# EAGLE board AHNS_AP_MK3 (EAGLE 5.10)
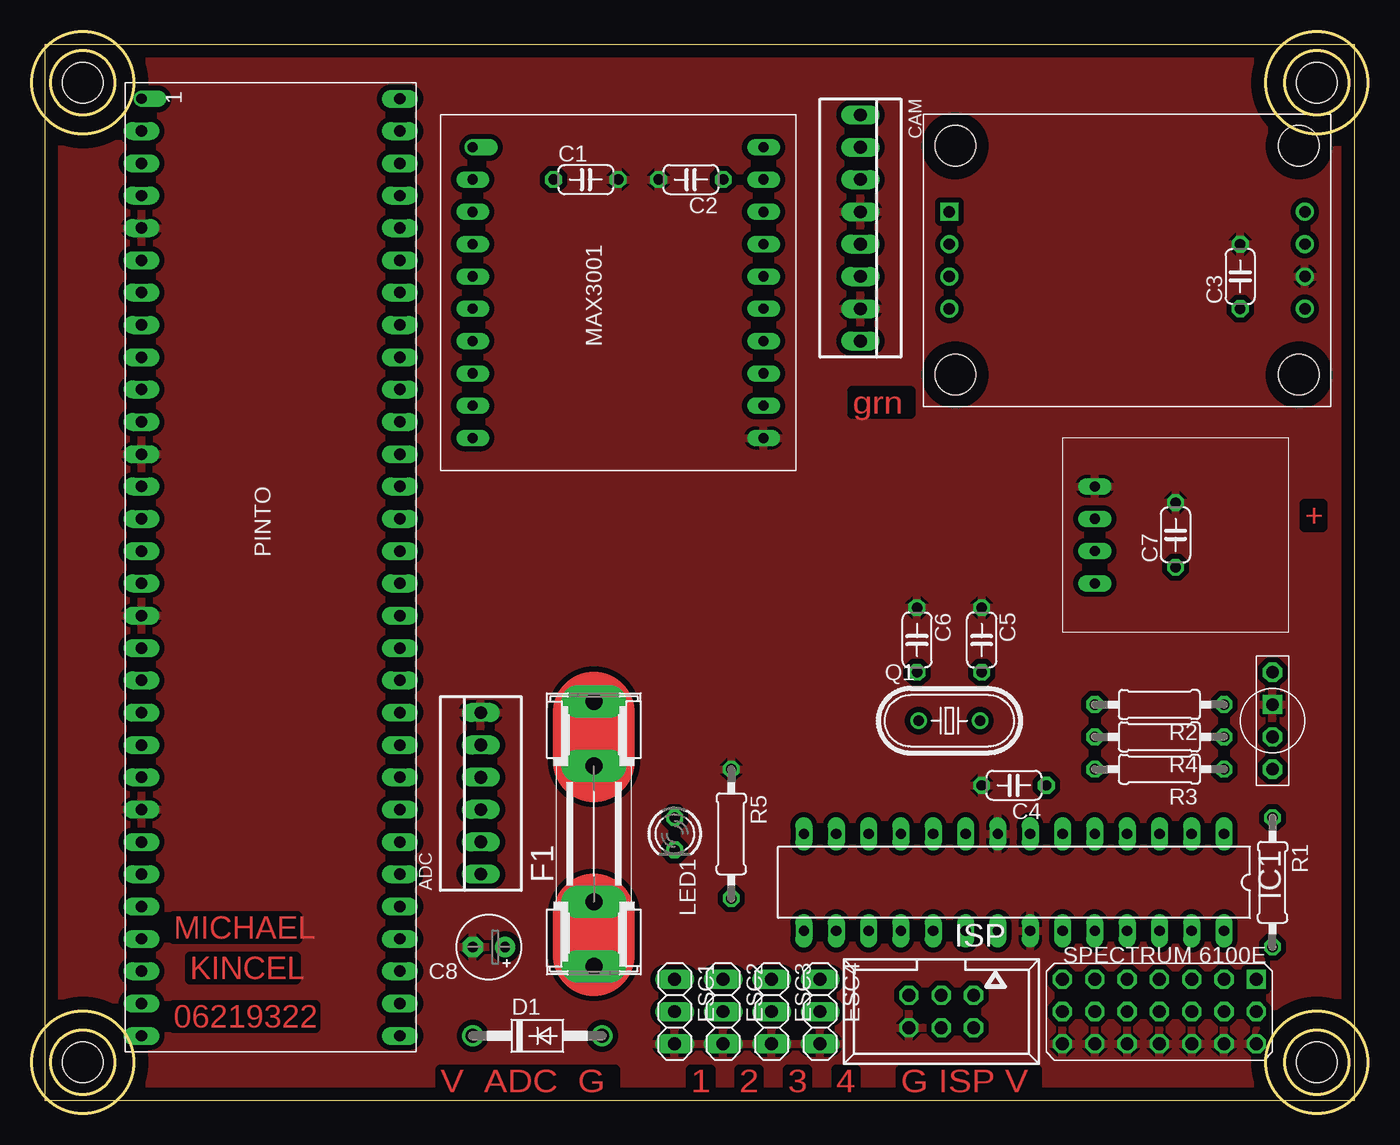
[diagram p0: board, top side]
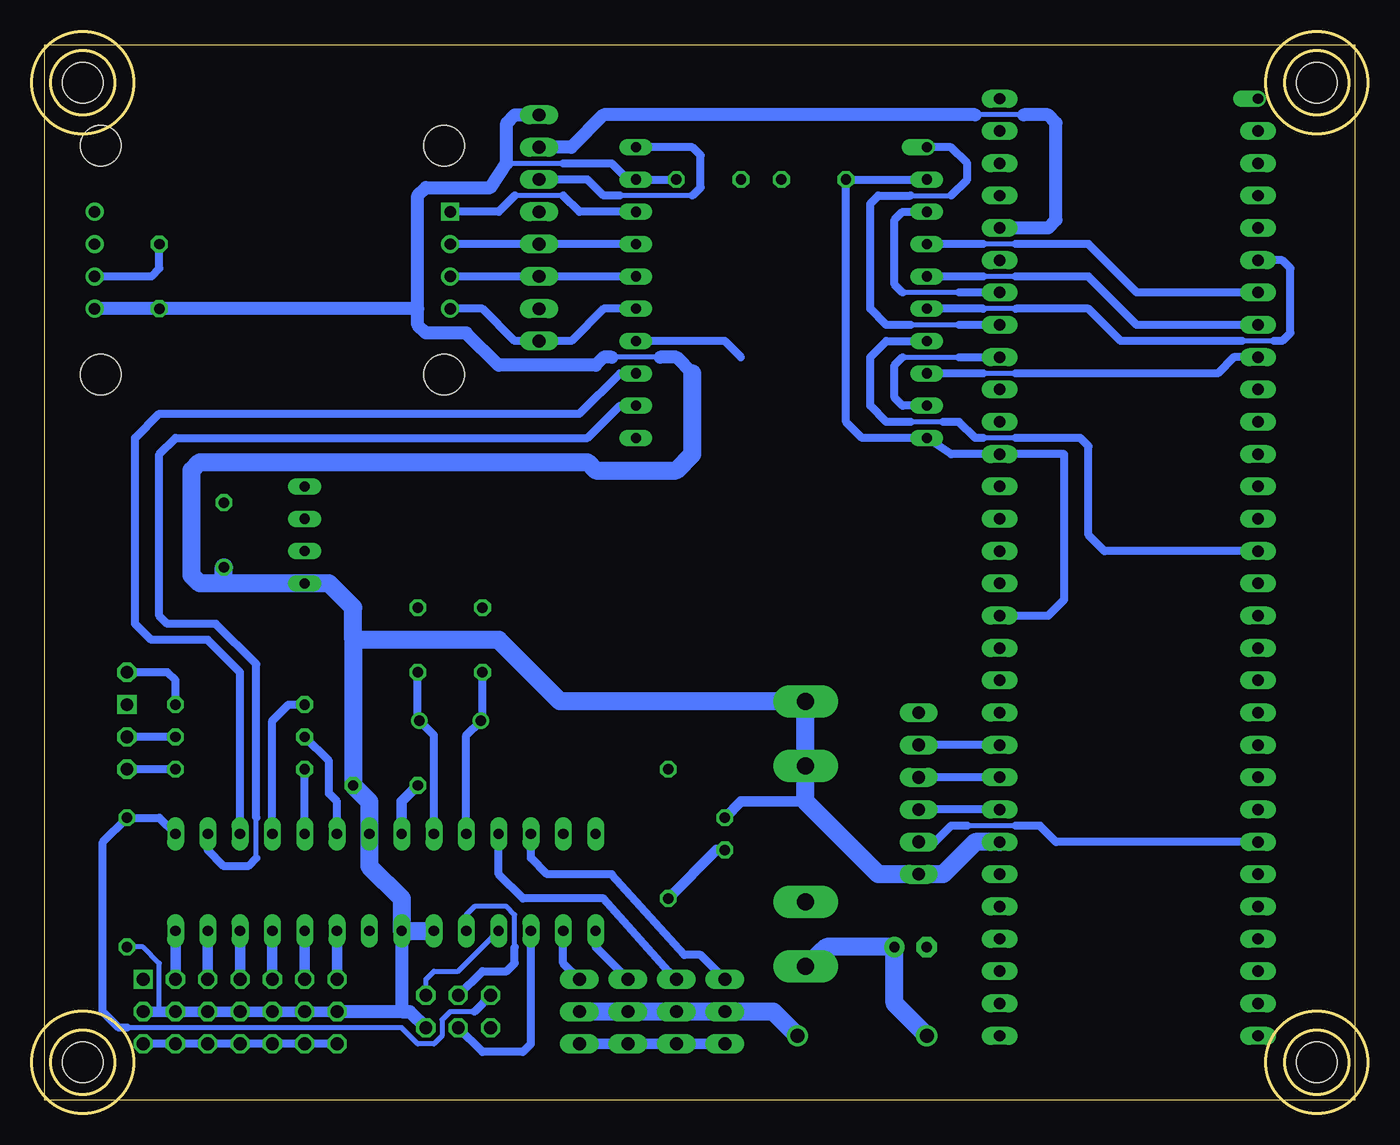
[diagram p1: board, bottom side, seen from below]

Size 105 x 85 mm. Coordinates in mm from the lower left corner, seen from the top.
Outline: 1,1 104,1 104,84 1,84 1,1
Outline: circle at 101,4 radius 4
Outline: circle at 101,81 radius 4
Outline: circle at 4,81 radius 4
Outline: circle at 4,4 radius 4
Outline: circle at 4,4 radius 2.5
Outline: circle at 4,81 radius 2.5
Outline: circle at 101,81 radius 2.5
Outline: circle at 101,4 radius 2.5
Copper layers (1*16): Top 0.035mm / dielectric 1.5mm / Bottom 0.035mm
Design rules "default": minimum track width 10mil, minimum drill 24mil, track to track 8mil, track to pad 8mil, pad to pad 8mil, via to via 8mil, smd to smd 8mil, copper to edge 40mil, drill to drill 8mil, minimum pad ring 10mil, minimum via ring 8mil, stop-mask expansion 4mil, vias tented up to drill 0mil, thermal gap 10mil
Holes 3.2 mm at 4,4 101,4 101,81 4,81

## Footprints (pad centres in the part's own frame; a part is rotated, then mirrored left to right if it is on the bottom)
22-23-2061 = drill 1 long: 1 -6.35,0; 2 -3.81,0; 3 -1.27,0; 4 1.27,0; 5 3.81,0; 6 6.35,0
C050-024X044 = drill 0.813 octagon: 1 -2.54,0; 2 2.54,0
E2,5-5 = drill 0.813 pad 1.6 round: + -1.27,0 | drill 0.813 pad 1.6 octagon: - 1.27,0
22-23-2081 = drill 1 long: 1 -8.89,0; 2 -6.35,0; 3 -3.81,0; 4 -1.27,0; 5 1.27,0; 6 3.81,0; 7 6.35,0; 8 8.89,0
DO41-10 = drill 1.118 round: A 5.08,0; C -5.08,0
1X03 = drill 1.016 long: 1 -2.54,0; 2 0,0; 3 2.54,0
SHK20L = drill 1.321 pad 2.54 long: 1A -10.414,0; 1B -5.334,0; 2A 10.414,0; 2B 5.334,0
DIL28-3 = drill 0.813 long: 1 -16.51,-3.81; 2 -13.97,-3.81; 3 -11.43,-3.81; 4 -8.89,-3.81; 5 -6.35,-3.81; 6 -3.81,-3.81; 7 -1.27,-3.81; 8 1.27,-3.81; 9 3.81,-3.81; 10 6.35,-3.81; 11 8.89,-3.81; 12 11.43,-3.81; 13 13.97,-3.81; 14 16.51,-3.81; 15 16.51,3.81; 16 13.97,3.81; 17 11.43,3.81; 18 8.89,3.81; 19 6.35,3.81; 20 3.81,3.81; 21 1.27,3.81; 22 -1.27,3.81; 23 -3.81,3.81; 24 -6.35,3.81; 25 -8.89,3.81; 26 -11.43,3.81; 27 -13.97,3.81; 28 -16.51,3.81
057-006-1 = drill 1 octagon: 1 -2.54,-1.27; 2 -2.54,1.27; 3 0,-1.27; 4 0,1.27; 5 2.54,-1.27; 6 2.54,1.27
LED3MM = drill 0.813 octagon: A -1.27,0; K 1.27,0
HC49U70 = drill 0.813 round: 1 -2.413,0; 2 2.413,0
0207/10 = drill 0.813 octagon: 1 -5.08,0; 2 5.08,0
PINTO = drill 0.8 offset: P$1 1.27,1.27 | drill 0.9 long: P$2 1.27,21.59; P$3 3.81,1.27; P$4 3.81,21.59; P$5 6.35,1.27; P$6 6.35,21.59; P$7 8.89,1.27; P$8 8.89,21.59; P$9 11.43,1.27; P$10 11.43,21.59; P$11 13.97,1.27; P$12 13.97,21.59; P$13 16.51,1.27; P$14 16.51,21.59; P$15 19.05,1.27; P$16 19.05,21.59; P$17 21.59,1.27; P$18 21.59,21.59; P$19 24.13,1.27; P$20 24.13,21.59; P$21 26.67,1.27; P$22 26.67,21.59; P$23 29.21,1.27; P$24 29.21,21.59; P$25 31.75,1.27; P$26 31.75,21.59; P$27 34.29,1.27; P$28 34.29,21.59; P$29 36.83,1.27; P$30 36.83,21.59; P$31 39.37,1.27; P$32 39.37,21.59; P$33 41.91,1.27; P$34 41.91,21.59; P$35 44.45,1.27; P$36 44.45,21.59; P$37 46.99,1.27; P$38 46.99,21.59; P$39 49.53,1.27; P$40 49.53,21.59; P$41 52.07,1.27; P$42 52.07,21.59; P$43 54.61,1.27; P$44 54.61,21.59; P$45 57.15,1.27; P$46 57.15,21.59; P$47 59.69,1.27; P$48 59.69,21.59; P$49 62.23,1.27; P$50 62.23,21.59; P$51 64.77,1.27; P$52 64.77,21.59; P$53 67.31,1.27; P$54 67.31,21.59; P$55 69.85,1.27; P$56 69.85,21.59; P$57 72.39,1.27; P$58 72.39,21.59; P$59 74.93,1.27; P$60 74.93,21.59
DIP = drill 0.8 offset: P$1 2.54,2.54 | drill 0.8 long: P$2 5.08,2.54; P$3 7.62,2.54; P$4 10.16,2.54; P$5 12.7,2.54; P$6 15.24,2.54; P$7 17.78,2.54; P$8 20.32,2.54; P$9 22.86,2.54; P$10 25.4,2.54; P$11 25.4,25.4; P$12 22.86,25.4; P$13 20.32,25.4; P$14 17.78,25.4; P$15 15.24,25.4; P$16 12.7,25.4; P$17 10.16,25.4; P$18 7.62,25.4; P$19 5.08,25.4; P$20 2.54,25.4
SEN_DYN_6DOF_IMU = drill 0.9 square: CS 13.97,-3.81 | drill 0.9 round: GND -13.97,1.27; MISO 13.97,1.27; MOSI 13.97,-1.27; SCK 13.97,3.81; UARTRX -13.97,-1.27; UARTTX -13.97,-3.81; VCC -13.97,3.81 | hole 3.2: -13.5,-9; 13.5,-9; 13.5,9; -13.5,9
SPECTRUM_6100E = drill 1 octagon: BATT_GND 2.54,7.62; BATT_VCC 0,7.62; CH1_GND 2.54,5.08; CH1_SIG -2.54,5.08; CH1_VCC 0,5.08; CH2_GND 2.54,2.54; CH2_SIG -2.54,2.54; CH2_VCC 0,2.54; CH3_GND 2.54,0; CH3_SIG -2.54,0; CH3_VCC 0,0; CH4_GND 2.54,-2.54; CH4_SIG -2.54,-2.54; CH4_VCC 0,-2.54; CH5_GND 2.54,-5.08; CH5_SIG -2.54,-5.08; CH5_VCC 0,-5.08; CH6_GND 2.54,-7.62; CH6_SIG -2.54,-7.62; CH6_VCC 0,-7.62 | drill 1 square: NC -2.54,7.62
TRI_COLOR_LED = drill 1 octagon: BLU 1.27,0; GRN 3.81,0; RED -3.81,0 | drill 1 square: CATHODE -1.27,0
OS4000 = drill 0.8 long: GND 6.35,-3.81; RXDO 6.35,1.27; TXDI 6.35,-1.27; VCC 6.35,3.81

## Placement (x,y rotation side)
ADC  [22-23-2061]  35.29,25.13 90 top
C1  100n  [C050-024X044]  43.55,73.39 0 top
C2  100n  [C050-024X044]  51.8,73.39 180 top
C3  100n  [C050-024X044]  94.98,65.77 90 top
C4  100n  [C050-024X044]  77.2,25.77 180 top
C5  22p  [C050-024X044]  74.66,37.2 270 top
C6  22p  [C050-024X044]  69.58,37.2 270 top
C7  100n  [C050-024X044]  89.9,45.45 90 top
C8  100u  [E2,5-5]  35.92,13.06 180 top
CAM  22-23-2081  [22-23-2081]  65.14,69.58 270 top
D1  1N5819  [DO41-10]  39.73,6.08 0 top
ESC1  [1X03]  50.53,7.99 270 top
ESC2  [1X03]  54.34,7.99 270 top
ESC3  [1X03]  58.15,7.99 270 top
ESC4  [1X03]  61.96,7.99 270 top
F1  0.5A  [SHK20L]  44.18,21.95 90 top
IC1  ATMEGA168-PU  [DIL28-3]  77.2,18.14 180 top
ISP  057-006-1  [057-006-1]  71.48,7.99 180 top
LED1  [LED3MM]  50.53,21.95 270 top
Q1  16Mhz  [HC49U70]  72.12,30.84 0 top
R1  10k  [0207/10]  97.52,18.14 270 top
R2  1k  [0207/10]  88.63,32.11 180 top
R3  1k  [0207/10]  88.63,27.04 180 top
R4  1k  [0207/10]  88.63,29.57 180 top
R5  1k  [0207/10]  54.98,21.95 270 top
U$1  PINTO  [PINTO]  7.35,81.01 270 top
U$2  MAX3001DIP  [DIP]  32.11,78.47 270 top
U$3  SEN_DYN_6DOF_IMU  [SEN_DYN_6DOF_IMU]  86.09,67.04 180 top
U$4  SPECTRUM_6100E  [SPECTRUM_6100E]  88.63,7.99 270 top
U$5  TRI_COLOR_LED  [TRI_COLOR_LED]  97.52,30.84 270 top
U$7  OS4000  [OS4000]  89.9,45.45 180 top

## Library data of the parts
ADC CAM = con-molex
C1-C8 R1-R5 = rcl
D1 = diode
ESC1-ESC4 = pinhead
F1 = fuse
IC1 = Arduino-AVR
ISP = con-panduit
LED1 = led
Q1 = crystal
U$1 U$3-U$5 U$7 = AHNS10
U$2 = maxim-11

## Nets
ADC2: ADC.5 U$1.P$42
ADC3: ADC.3 U$1.P$46
ADC4: ADC.2 U$1.P$47
ADC5: ADC.4 U$1.P$44
CLK_1V8: U$1.P$11 U$2.P$6
CLK_5V: CAM.8 U$2.P$15 U$3.SCK
CS0_1V8: U$1.P$14 U$2.P$3
CS0_5V: U$2.P$18 U$3.CS
CS1_1V8: U$1.P$16 U$2.P$1
CS1_5V: CAM.3 U$2.P$20
ESC1: ESC1.1 IC1.12
ESC2: ESC2.1 IC1.11
ESC3: ESC3.1 IC1.15
ESC4: ESC4.1 IC1.16
GND: ADC.6 C1.2 C2.2 C3.2 C4.2 C5.1 C6.1 C7.2 C8.- CAM.4 CAM.7 ESC1.3 ESC2.3 ESC3.3 ESC4.3 IC1.8 IC1.22 ISP.6 R5.1 U$1.P$9 U$1.P$23 U$1.P$33 U$1.P$45 U$2.P$11 U$3.GND U$4.BATT_GND U$4.CH1_GND U$4.CH2_GND U$4.CH3_GND U$4.CH4_GND U$4.CH5_GND U$4.CH6_GND U$5.CATHODE U$7.GND
ISP_MISO: IC1.18 ISP.1
ISP_MOSI: IC1.17 ISP.4
ISP_SCK: IC1.19 ISP.3
MISO_1V8: U$1.P$15 U$2.P$5
MISO_5V: CAM.6 U$2.P$16 U$3.MISO
MOSI_1V8: U$1.P$13 U$2.P$4
MOSI_5V: CAM.5 U$2.P$17 U$3.MOSI
N$1: C5.2 IC1.9 Q1.2
N$2: R2.1 U$5.RED
N$3: C6.2 IC1.10 Q1.1
N$4: R3.1 U$5.GRN
N$5: R4.1 U$5.BLU
N$6: IC1.5 R3.2
N$7: IC1.4 R2.2
N$8: IC1.6 R4.2
N$9: C8.+ D1.C F1.1A
N$10: LED1.K R5.2
RC_CH1: IC1.28 U$4.CH1_SIG
RC_CH2: IC1.27 U$4.CH2_SIG
RC_CH3: IC1.26 U$4.CH3_SIG
RC_CH4: IC1.25 U$4.CH4_SIG
RC_CH5: IC1.24 U$4.CH5_SIG
RC_CH6: IC1.23 U$4.CH6_SIG
RESET: IC1.1 ISP.5 R1.1
RXD1_1V8: U$1.P$17 U$2.P$8
RXD1_5V: IC1.2 U$2.P$12
RXD3_1V8: U$1.P$29 U$2.P$7
TXD1_1V8: U$1.P$18 U$2.P$9
TXD1_5V: IC1.3 U$2.P$13
TXD3_5V: U$2.P$14
V_IN: D1.A ESC1.2 ESC2.2 ESC3.2 ESC4.2
VCC_1V8: C1.1 U$1.P$24 U$1.P$34 U$2.P$2 U$2.P$10
VCC_3V3: CAM.2 U$1.P$10
VCC_5V: ADC.1 C2.1 C3.1 C4.1 C7.1 CAM.1 F1.2A IC1.7 IC1.20 IC1.21 ISP.2 LED1.A R1.2 U$1.P$48 U$2.P$19 U$3.VCC U$4.BATT_VCC U$4.CH1_VCC U$4.CH2_VCC U$4.CH3_VCC U$4.CH4_VCC U$4.CH5_VCC U$4.CH6_VCC U$7.VCC

## Tracks (layer width: path | path; a pad name or v marks a point on that pad's centre or on a via)
ADC2
  Bottom 0.61: U$1.P$42 ADC.5
ADC3
  Bottom 0.61: U$1.P$46 ADC.3
ADC4
  Bottom 0.406: 27.67,22.59 31.48,22.59
  Bottom 0.61: ADC.2 34.02,21.32 32.75,22.59 31.48,22.59 | 27.67,22.59 25.77,22.59 24.5,21.32 U$1.P$47
ADC5
  Bottom 0.61: U$1.P$44 ADC.4
CLK_1V8
  Bottom 0.406: 27.67,63.23 30.21,63.23 | 7.35,60.69 9.89,60.69
  Bottom 0.61: 30.21,63.23 U$2.P$6 | 27.67,63.23 21.95,63.23 19.41,60.69 9.89,60.69 | 7.35,60.69 6.71,60.69 6.08,61.33 6.08,66.41 6.71,67.04 U$1.P$11
CLK_5V
  Bottom 0.61: U$3.SCK 69.58,63.23 67.04,60.69 CAM.8 62.59,60.69 60.05,63.23 U$2.P$15
CS0_1V8
  Bottom 0.406: 32.11,64.5 36.56,64.5
  Bottom 0.61: U$1.P$14 32.11,64.5 | 36.56,64.5 37.2,65.14 37.2,70.22 36.56,70.85 U$2.P$3
CS0_5V
  Bottom 0.406: 63.23,72.12 67.04,72.12
  Bottom 0.61: U$3.CS 68.31,70.85 67.04,72.12 | 63.23,72.12 61.96,70.85 U$2.P$18
CS1_1V8
  Bottom 0.406: 32.11,61.96 35.92,61.96 | 35.92,72.12 32.75,72.12
  Bottom 0.61: U$1.P$16 32.11,61.96 | 35.92,61.96 37.83,61.96 39.1,63.23 39.1,71.48 38.47,72.12 35.92,72.12 | 32.75,72.12 31.48,73.39 31.48,74.66 32.75,75.93 U$2.P$1
CS1_5V
  Bottom 0.406: 53.07,72.12 58.78,72.12
  Bottom 0.61: CAM.3 61.33,73.39 60.05,72.12 58.78,72.12 | 53.07,72.12 52.44,72.75 52.44,75.3 53.07,75.93 U$2.P$20
ESC1
  Bottom 0.61: ESC1.1 52.44,12.43 53.7,12.43 59.42,18.78 64.5,18.78 65.77,20.05 IC1.12
ESC2
  Bottom 0.61: ESC2.1 54.98,11.16 60.05,16.88 66.41,16.88 68.31,18.78 IC1.11
ESC3
  Bottom 0.61: ESC3.1 60.69,13.06 IC1.15
ESC4
  Bottom 0.61: ESC4.1 63.23,11.79 IC1.16
GND
  Bottom 0.61: U$4.CH6_GND U$4.CH5_GND U$4.CH4_GND U$4.CH3_GND U$4.CH2_GND U$4.CH1_GND U$4.BATT_GND | U$3.GND 95.61,65.77 94.98,66.41 C3.2
  Bottom 0.813: ESC1.3 ESC4.3 | IC1.8 75.93,24.5 C4.2
  pour Top (isolate 0.406): 1,1 104,1 104,84 1,84
ISP_MISO
  Bottom 0.406: ISP.1 74.03,10.53 73.39,11.16 71.48,11.16 IC1.18
ISP_MOSI
  Bottom 0.61: ISP.4 69.58,4.81 66.41,4.81 65.77,5.45 IC1.17
ISP_SCK
  Bottom 0.406: 67.04,13.06 67.04,15.61 67.67,16.24 70.22,16.24 70.85,15.61 IC1.19
  Bottom 0.61: ISP.3 69.58,11.16 67.67,11.16 67.04,11.79 67.04,13.06
MISO_1V8
  Bottom 0.406: 27.67,65.77 30.21,65.77
  Bottom 0.61: 30.21,65.77 U$2.P$5 | 27.67,65.77 21.95,65.77 18.14,61.96 U$1.P$15
MISO_5V
  Bottom 0.61: U$3.MISO CAM.6 U$2.P$16
MOSI_1V8
  Bottom 0.406: 27.67,68.31 30.21,68.31
  Bottom 0.61: 30.21,68.31 U$2.P$4 | 27.67,68.31 21.95,68.31 18.14,64.5 U$1.P$13
MOSI_5V
  Bottom 0.61: U$3.MOSI CAM.5 U$2.P$17
N$1
  Bottom 0.61: IC1.9 73.39,29.7 Q1.2 74.66,30.84 C5.2
N$2
  Bottom 0.61: R2.1 93.71,34.02 94.34,34.66 U$5.RED
N$3
  Bottom 0.61: IC1.10 70.85,29.7 Q1.1 69.58,30.84 C6.2
N$4
  Bottom 0.61: R3.1 U$5.GRN
N$5
  Bottom 0.61: R4.1 U$5.BLU
N$6
  Bottom 0.61: IC1.5 R3.2
N$7
  Bottom 0.61: IC1.4 86.09,30.84 84.82,32.11 R2.2
N$8
  Bottom 0.61: IC1.6 81.01,24.5 81.64,25.13 81.64,27.67 R4.2
N$9
  Bottom 1.422: D1.C 37.2,8.62 C8.+ 42.53,13.06 F1.1A
N$10
  Bottom 0.813: LED1.K 51.16,20.68 R5.2
N$12
  Top 6.452: 44.18,12.43 44.18,15.61
N$13
  Top 6.452: 44.18,27.67 44.18,31.48
RC_CH1
  Bottom 0.813: U$4.CH1_SIG IC1.28
RC_CH2
  Bottom 0.813: U$4.CH2_SIG IC1.27
RC_CH3
  Bottom 0.813: U$4.CH3_SIG IC1.26
RC_CH4
  Bottom 0.813: U$4.CH4_SIG IC1.25
RC_CH5
  Bottom 0.813: U$4.CH5_SIG IC1.24
RC_CH6
  Bottom 0.813: U$4.CH6_SIG IC1.23
RESET
  Bottom 0.406: 70.22,7.99 72.12,7.99 72.75,7.35 72.75,6.08 73.39,5.45 74.66,5.45 75.93,6.71 97.52,6.71
  Bottom 0.61: ISP.5 70.22,7.99 | 97.52,6.71 98.16,6.71 99.42,7.99 99.42,21.32 R1.1 94.98,23.23 IC1.1
RXD1_1V8
  Bottom 0.406: 27.67,58.15 30.21,58.15
  Bottom 0.61: 30.21,58.15 U$2.P$8 | 27.67,58.15 11.79,58.15 10.53,59.42 U$1.P$17
RXD1_5V
  Bottom 0.406: 87.36,20.05 87.36,23.23
  Bottom 0.61: IC1.2 91.17,20.68 89.9,19.41 88,19.41 87.36,20.05 | 87.36,23.23 87.36,35.29 90.53,38.47 94.34,38.47 94.98,39.1 94.98,51.8 93.71,53.07 61.33,53.07 58.78,55.61 U$2.P$12
RXD3_1V8
  Bottom 0.406: 27.67,53.07 30.21,53.07 | 33.38,54.34 35.92,54.34
  Bottom 0.61: 27.67,53.07 22.59,53.07 21.95,52.44 21.95,45.45 20.68,44.18 U$1.P$29 | 30.21,53.07 30.84,53.07 32.11,54.34 33.38,54.34 | U$2.P$7 37.83,60.69 39.1,59.42 39.1,55.61 37.83,54.34 35.92,54.34
TXD1_1V8
  Bottom 0.406: 36.56,59.42 32.11,59.42
  Bottom 0.61: 36.56,59.42 37.2,58.78 37.2,56.24 36.56,55.61 U$2.P$9 | 32.11,59.42 U$1.P$18
TXD1_5V
  Bottom 0.61: IC1.3 88.63,34.66 91.17,37.2 95.61,37.2 96.89,38.47 96.89,53.07 94.98,54.98 61.96,54.98 58.78,58.15 U$2.P$13
TXD3_5V
  Bottom 0.61: U$2.P$14 50.53,60.69 49.26,59.42
V_IN
  Bottom 1.422: ESC4.2 ESC3.2 ESC2.2 ESC1.2 46.72,7.99 D1.A
VCC_1V8
  Bottom 0.61: U$1.P$34 25.13,39.1 23.86,40.37 23.86,51.8 U$1.P$24 32.75,51.8 U$2.P$10 39.73,53.07 41.01,54.34 C1.1 U$2.P$2
VCC_3V3
  Bottom 0.406: 27.04,78.47 30.84,78.47
  Bottom 1.016: CAM.2 62.59,75.93 60.05,78.47 30.84,78.47 | 27.04,78.47 25.13,78.47 24.5,77.83 24.5,70.22 25.13,69.58 U$1.P$10
VCC_5V
  Bottom 0.406: R1.2 96.25,13.06 94.98,11.79 94.98,7.99 | 55.61,59.42 59.42,59.42 | 67.67,74.66 63.23,74.66
  Bottom 0.61: 63.23,74.66 59.42,74.66 58.15,73.39 U$2.P$19 C2.1
  Bottom 0.813: U$4.CH6_VCC U$4.CH5_VCC U$4.CH4_VCC U$4.CH3_VCC U$4.CH2_VCC U$4.CH1_VCC 94.98,7.99 U$4.BATT_VCC | LED1.A 49.26,24.5 44.18,24.5
  Bottom 1.016: IC1.21 75.93,7.99 | 75.93,7.99 U$4.CH6_VCC | ISP.2 75.3,7.99 75.93,7.99 | U$3.VCC C3.1 74.66,63.23 | 55.61,59.42 54.34,59.42 53.07,58.15 | 59.42,59.42 60.05,59.42 60.69,58.78 68.31,58.78 70.85,61.33 74.03,61.33 74.66,61.96 74.66,63.23 | 74.66,63.23 74.66,72.12 74.03,72.75 68.94,72.75 67.67,74.66 67.67,77.83 67.04,78.47 CAM.1
  Bottom 1.422: IC1.20 IC1.21 75.93,16.88 78.47,19.41 IC1.7 78.47,24.5 C4.1 79.74,37.2 | U$1.P$48 30.84,21.32 33.38,18.78 ADC.1 38.47,18.78 44.18,24.5 F1.2A 63.48,32.37 68.31,37.2 79.74,37.2 | 79.74,37.2 79.74,39.73 81.64,41.64 U$7.VCC 89.9,41.64 | 89.9,41.64 91.81,41.64 92.44,42.27 92.44,50.53 91.81,51.16 61.33,51.16 60.69,50.53 54.34,50.53 53.07,51.8 53.07,58.15 | 89.9,41.64 C7.1

## Text on the board
Top: grn | + | MICHAEL | KINCEL | 06219322 | V ADC G | 1 | 2 | 3 | 4 | G ISP V